# Altium PCB ATPComputerBoard.PcbDoc
Units mil, origin at the board's own origin, x right, y up, seen from the top; angles counter-clockwise.
Board outline 1394 x 1000 mil, 2 copper layers (Top Layer, Bottom Layer); 23 components, 22 nets, 127 pads, 31 vias.
Unrouted connection lines stored in the file: 1.
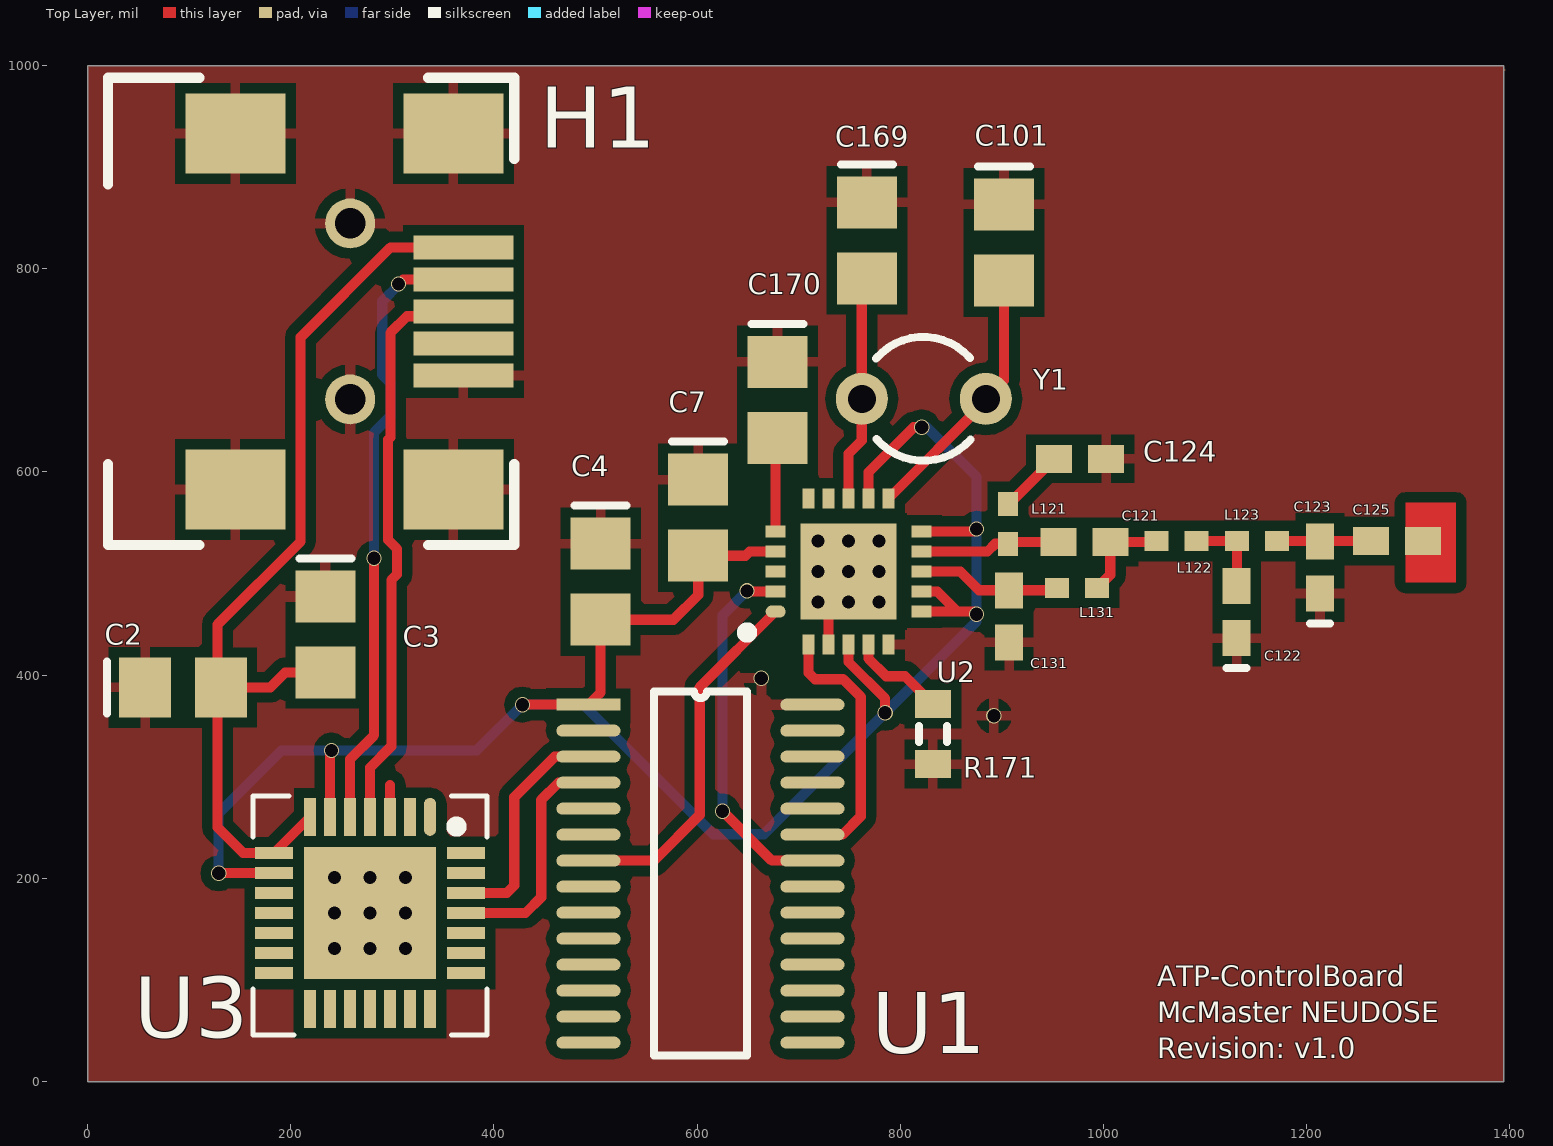
[diagram p0: Top Layer view]
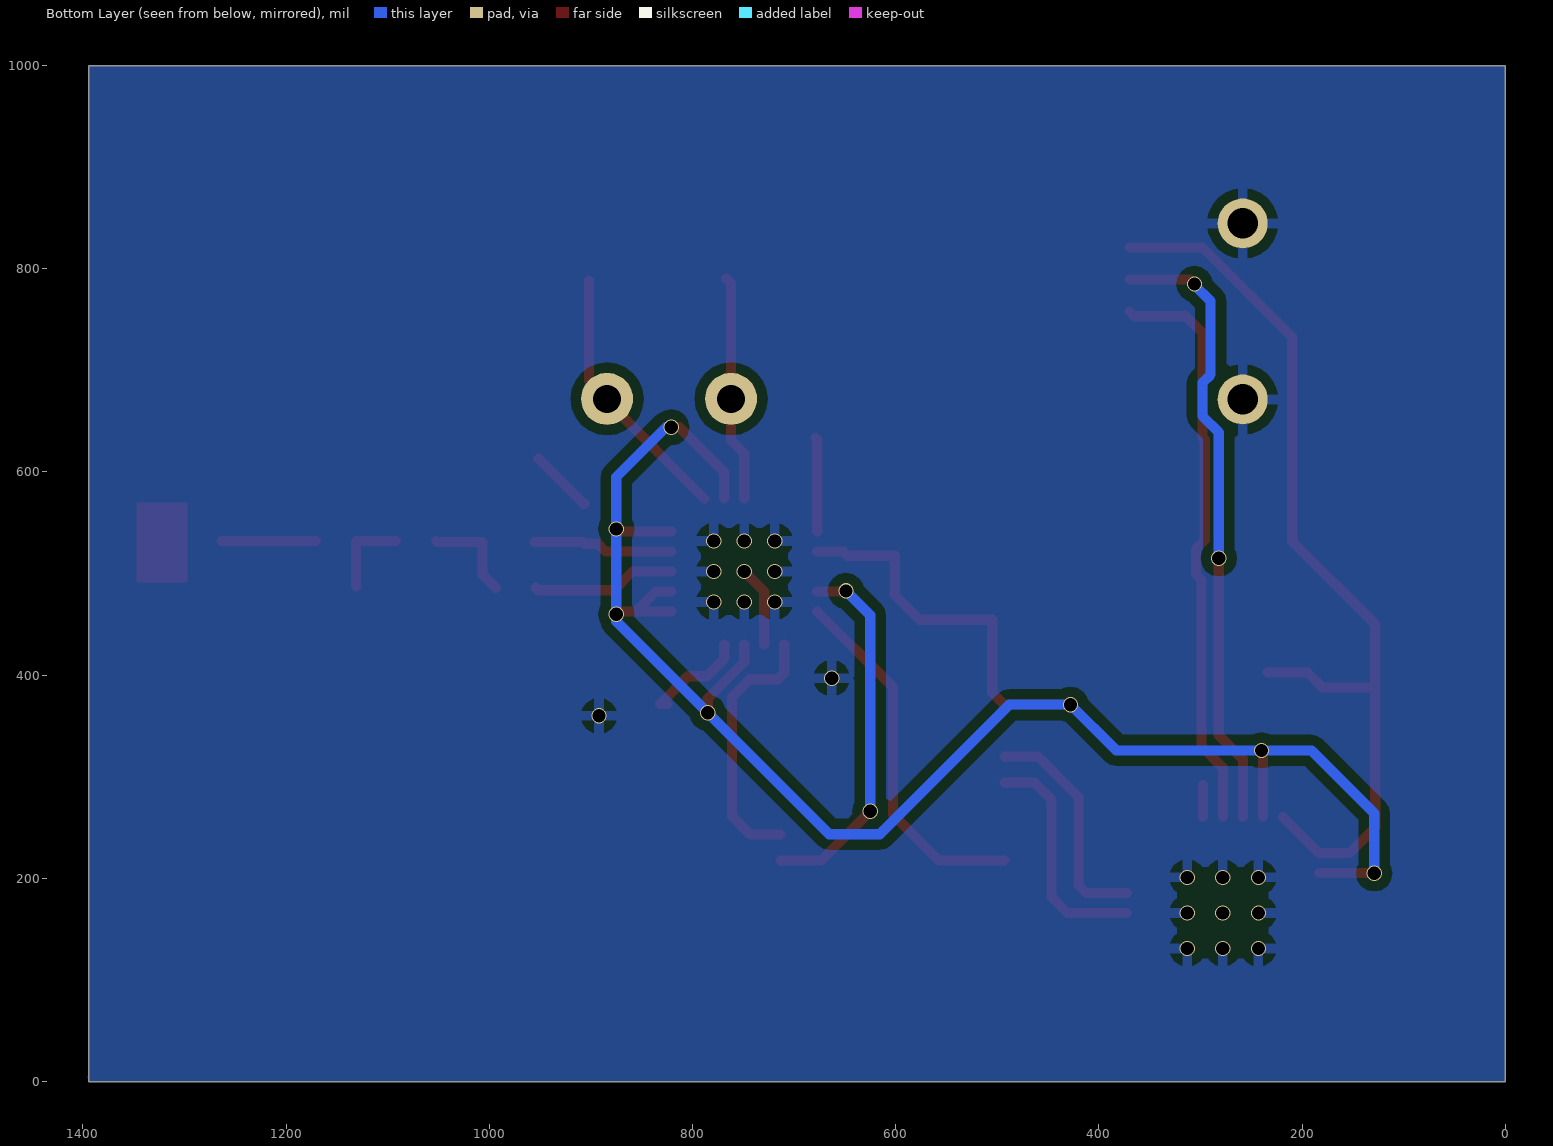
[diagram p1: Bottom Layer view, seen from below]

## Layer stack, top to bottom
Top Solder: solder mask 0.4, Solder Resist, Dk 3.5
Top Layer: signal copper 1.4
Dielectric 1: dielectric 12.6, FR-4, Dk 4.8
Bottom Layer: signal copper 1.4
Bottom Solder: solder mask 0.4, Solder Resist, Dk 3.5

## Board outline
0,0 0,1000 1394,1000 1394,0

## Design rules (kind name [scope] priority, off if disabled: settings)
Clearance [All] p1: gap=10
PolygonConnect [All] p1: connectstyle=Relief reliefconductorwidth=10 reliefentries=4 polygonreliefangle="90 Angle" airgapwidth=10
RoutingVias [All] p1: holewidth=28 width=50 viastyle="Through Hole" minholewidth=28 minwidth=50 maxholewidth=28 maxwidth=50
SolderMaskExpansion [All] p1: expansion=4
UnpouredPolygon [All] p1: allowunpoured=FALSE
Width [All] p1: maxlimit=10 minlimit=10 preferedwidth=10
29 further rules are at their usual default settings.

## Classes and differential pairs
component class CC110L: C101 C121 C122 C123 C124 C125 C131 C169 C170 L121 L122 L123 L131 R171 U2 Y1
component class CP2102: C2 C3 C4 C7 U3
component class MSP430: U1

## Components (designator, comment, footprint, x,y, rotation, side; value= is the part's Value field where it differs from the comment)
C2 "C0805" 0805 94,388 r0 top
C3 "C0805" 0805 234,440 r270 top
C4 "C0805" 0805 505,492 r270 top
C7 "C0805" 0805 601,555 r270 top
C101 "C0805" 0805 902,826 r270 top
C121 "C0402" 0402 981,531 r0 top
C122 "C0402" 0402 1131,462 r90 top
C123 "C0402" 0402 1213,506 r90 top
C124 "C0402" 0402 977,613 r0 top
C125 "C0402" 0402 1289,532 r0 top
C131 "C0402" 0402 907,458 r90 top
C169 "C0805" 0805 767,828 r270 top
C170 "C0805" 0805 679,671 r270 top
H1 "MiniUSB" MiniUSB 360,758 r270 top
L121 "Inductor" 0402-A 906,549 r90 top
L122 "Inductor" 0402-A 1072,532 r180 top
L123 "Inductor" 0402-A 1151,532 r180 top
L131 "Inductor" 0402-A 974,486 r0 top
R171 "Res3" J1-0603 832,342 r270 top
U1 "MSP430" 28TSSOP 493,371 r0 top locked
U2 "CC110L 20QFN" 20QFN 749,502 r90 top
U3 "CP2102" CP2102 278,166 r270 top
Y1 "XTAL" R38 823,672 r270 top

## Footprints (in the part's own frame and the unit in brackets; to place one, negate y for a bottom-side part, rotate by r counter-clockwise, add the part's x,y. Pads: shape width x height; smd on the part's side, far side on the other; paste and mask are expansions set on the pad)
20QFN [mm]
  rect 2.4x2.4 smd mask+0: 0(0,0)
  oval 0.3x0.5 smd: 1(-1,1.825)
  rect 0.3x0.5 smd: 2(-0.5,1.825) 3(0,1.825) 4(0.5,1.825) 5(1,1.825) 11(1,-1.825) 12(0.5,-1.825) 13(0,-1.825) 14(-0.5,-1.825) 15(-1,-1.825)
  rect 0.5x0.3 smd: 6(1.825,1) 7(1.825,0.5) 8(1.825,0) 9(1.825,-0.5) 10(1.825,-1) 16(-1.825,-1) 17(-1.825,-0.5) 18(-1.825,0) 19(-1.825,0.5) 20(-1.825,1)
  silkscreen extent -1.65,2.41 -1.4,2.67, body extent -2.07,-2.07 2.07,2.07, height 1
28TSSOP [mm]
  rect 1.6x0.3 smd: 1(0,0)
  oval 1.6x0.3 smd: 2(0,-0.65) 3(0,-1.3) 4(0,-1.95) 5(0,-2.6) 6(0,-3.25) 7(0,-3.9) 8(0,-4.55) 9(0,-5.2) 10(0,-5.85) 11(0,-6.5) 12(0,-7.15) 13(0,-7.8) 14(0,-8.45) 15(5.6,-8.45) 16(5.6,-7.8) 17(5.6,-7.15) 18(5.6,-6.5) 19(5.6,-5.85) 20(5.6,-5.2) 21(5.6,-4.55) 22(5.6,-3.9) 23(5.6,-3.25) 24(5.6,-2.6) 25(5.6,-1.95) 26(5.6,-1.3) 27(5.6,-0.65) 28(5.6,0)
  silkscreen extent 1.63,-8.78 3.97,0.33, body extent -0.42,-9.07 6,0.63, height 0.88
0402 [mm] "Chip Capacitor; Body 1.0 x 0.5 mm (LxW typ)"
  rect 0.9x0.7 smd: 1(-0.65,0) 2(0.65,0)
0402-A [mm] "Chip Inductor, Body 1.0x0.5mm, IPC High Density"
  rect 0.6x0.5 smd: 1(-0.5,0) 2(0.5,0)
  body extent -0.55,-0.3 0.55,0.3, height 0.55
0805 [mm] "Chip Capacitor; Body 2.0 x 1.2 mm (LxW typ)"
  rect 1.3x1.5 smd: 1(-0.95,0) 2(0.95,0)
  silkscreen extent -1.9,-0.65 -1.9,0.65
CP2102 [mm]
  rect 3.3x3.3 smd mask+0: 0(0,0)
  oval 0.95x0.3 smd mask+0: 1(-2.4,1.5)
  rect 0.95x0.3 smd mask+0: 2(-2.4,1) 3(-2.4,0.5) 4(-2.4,0) 5(-2.4,-0.5) 6(-2.4,-1) 7(-2.4,-1.5) 15(2.4,-1.5) 16(2.4,-1) 17(2.4,-0.5) 18(2.4,0) 19(2.4,0.5) 20(2.4,1) 21(2.4,1.5)
  rect 0.3x0.95 smd mask+0: 8(-1.5,-2.4) 9(-1,-2.4) 10(-0.5,-2.4) 11(0,-2.4) 12(0.5,-2.4) 13(1,-2.4) 14(1.5,-2.4) 22(1.5,2.4) 23(1,2.4) 24(0.5,2.4) 25(0,2.4) 26(-0.5,2.4) 27(-1,2.4) 28(-1.5,2.4)
  silkscreen extent -2.92,-2.92 3.05,2.92, body extent -2.5,-2.5 2.5,2.5, height 1
J1-0603 [mm] "Chip Resistor, Body 1.6x0.8mm, IPC High Density"
  rect 0.7x0.9 smd: 1(-0.75,0) 2(0.75,0)
  silkscreen extent -0.2,-0.35 0.2,0.35, body extent -0.85,-0.48 0.85,0.48, height 0.9
MiniUSB [mm]
  rect 0.6x2.5 smd: 1(-1.6,0.25) 2(-0.8,0.25) 3(0,0.25) 4(0.8,0.25) 5(1.6,0.25)
  rect 2x2.5 smd: 6(-4.45,0) 7(-4.45,-5.45) 8(4.45,0) 9(4.45,-5.45)
  round 1.25 hole 0.762: 9(-2.2,-2.58) 10(2.2,-2.58)
  silkscreen extent -5.84,-8.64 5.84,1.52, body extent -4.95,-8.41 4.95,1.09, height 3.9
R38 [mm] "Crystal, Thru-Hole; 2 Leads; Body 3.1 x 8.2 mm (Dia.xH)"
  round 1.3 hole 0.7: 1(0,1.55) 2(0,-1.55)
  silkscreen extent -1.55,-1.19 1.55,1.17

## Part data
C2 C3 C4 C7 C101 C121 C122 C123 C124 C125 C131 C169 C170: "Ceramic Chip Capacitor - Standard"
R171: "Resistor"
Y1: "Crystal Oscillator"

## Via types
v1: diameter 15, hole 13, Top Layer to Bottom Layer, 31 vias

## Nets (pads, with @x,y where several pads share a name; then routed paths per layer and width w, separated by ;. In a path a pad name is that pad's centre, name@x,y a point inside that pad or via, vN(x,y) a via of type N, cw(c..) or ccw(c..) an arc to the next point about the centre after c; other vN are vias at no path point)
"3.3 VCC": C4.2 C7.2 U1.1 U2.4 U2.9 U2.11 U2.14 U2.15 U2.18 U3.6 U3.9 | length 2034.4
  Top Layer w10: v1(129,205) 129.37,205.37 U3.9 ; U3.6 238.63,324.63 v1(240,326) ; v1(428,371) U1.1 505,383 C4.2 576.6,454.6 601,479 C7.2 647.6,517.6 651.69,521.69 U2.4 ; U2.18 749,413 785,377 v1(785,363) ; U2.9 768.68,599.69 813,644 v1(821,644) ; U2.15 856,462.63 ; U2.14 836.32,482.32 856,462.63 ; U2.11 872.37,541.37 v1(875,544) ; v1(875,460) 872.37,462.63 856,462.63
  Bottom Layer w10: v1(129,205) 129,264 191,326 v1(240,326) 383,326 v1(428,371) 488.18,371 615.68,243.5 665.5,243.5 v1(785,363) 875,453 v1(875,460) v1(875,544) 875,595 826,644 v1(821,644)
CS1: U2.7
D+: H1.3 U3.4 | length 572.5
  Top Layer w10: U3.4 278,309 299,330 299,493.71 304.5,499.21 304.5,524.32 295.79,533.03 295.79,631.7 298.03,633.95 298.03,736.93 314.42,753.31 365.16,753.31 H1.3
D-: H1.2 U3.5 | length 618
  Top Layer w10: U3.5 258.32,317.32 282,341 v1(282,515) ; v1(306,785) 310.5,789.5 H1.2
  Bottom Layer w10: v1(282,515) 282,638.95 298.03,654.98 298.03,687.79 290,695.82 290,768 307,785 v1(306,785)
GND: C2.1 C3.1 C4.1 C7.1 C101.1 C122.1 C123.1 C124.2 C131.1 C169.1 C170.1 H1.5 H1.6 H1.7 H1.8 H1.9 H1.10 R171.2 U1.28 U2.0 U2.16 U2.19 U3.0 U3.3 | length 111.2
  Top Layer w10: U3.3 297.69,291.69 ; U2.19 729.32,482.31 v1(749,502)
  other v1: 243,131 278,131 313,131 243,166 278,166 313,166 243,201 278,201 313,201 892,360 663,397 719,472 749,472 779,472 719,502 779,502 719,532 749,532 779,532
MISO: U1.22 U2.2 | length 364
  Top Layer w10: v1(625,266) 673.54,217.46 U1.22 ; v1(649,483) 649.68,482.32 U2.2
  Bottom Layer w10: v1(625,266) 625,459 v1(649,483)
MOSI: U1.23 U2.20 | length 261.6
  Top Layer w10: U2.20 709.63,402.37 716,396 743.63,396 761,378.63 761,261.01 743.04,243.05 U1.23
NetC101_2: C101.2 U2.10 Y1.1 | length 261.8
  Top Layer w10: U2.10 884.02,669.5 Y1.1 902,689.98 C101.2
NetC121_1: C121.1 L121.1 U2.12 | length 138.4
  Top Layer w10: U2.12 885.69,521.69 893.32,529.31 L121.1 907.68,531 C121.1
NetC121_2: C121.2 L122.2 L131.2 | length 96.5
  Top Layer w10: L131.2 1006.59,498.91 C121.2 1051.31,531 L122.2
NetC122_2: C122.2 L122.1 L123.2 | length 84.2
  Top Layer w10: L122.1 L123.2 1131.31,487.91 C122.2
NetC123_2: C123.2 C125.1 L123.1 | length 92.7
  Top Layer w10: L123.1 1212.59,532 C125.1
NetC124_1: C124.1 L121.2 | length 63.8
  Top Layer w10: L121.2 907.09,568.69 C124.1
NetC131_2: C131.2 L131.1 U2.13 | length 142.1
  Top Layer w10: U2.13 859,502 877.41,483.59 C131.2 951.91,483.59 L131.1
NetC169_2: C169.2 U2.8 Y1.2 | length 224.2
  Top Layer w10: U2.8 749,618 761.98,630.98 Y1.2 761.98,785.57 C169.2
NetC170_2: C170.2 U2.5 | length 93
  Top Layer w10: U2.5 677.15,631.75 C170.2
NetR171_1: R171.1 U2.17 | length 102.9
  Top Layer w10: U2.17 768.68,416.31 786,399 804.53,399 R171.1 R171.1@824.76,371.53
RF_OUT: C125.2
SCLK: U1.7 U2.1 | length 359.2
  Top Layer w10: U1.7 557.46,217.46 602.5,262.5 602.5,387.98 U2.1
UART_RX_IN: U1.4 U3.25 | length 229.7
  Top Layer w10: U3.25 431,166 446.5,181.5 446.5,277.3 463.44,294.23 U1.4
UART_TX_OUT: U1.3 U3.26 | length 227
  Top Layer w10: U3.26 412.68,185.68 420,193 420,280 459.82,319.82 U1.3
VBUS: C2.2 C3.2 H1.1 U3.7 U3.8 | length 941.2
  Top Layer w10: U3.7 U3.8 153.05,225.06 128,250.11 C2.2@128,388 ; C3.2 194.6,402.6 180,388 C2.2 C2.2@128,388 ; H1.1 297.99,820.99 209.65,732.65 209.65,531.65 128,450 C2.2@128,388
pads on no net: H1.4 U1.2 U1.5 U1.6 U1.8 U1.9 U1.10 U1.11 U1.12 U1.13 U1.14 U1.15 U1.16 U1.17 U1.18 U1.19 U1.20 U1.21 U1.24 U1.25 U1.26 U1.27 U2.3 U2.6 U3.1 U3.2 U3.10 U3.11 U3.12 U3.13 U3.14 U3.15 U3.16 U3.17 U3.18 U3.19 U3.20 U3.21 U3.22 U3.23 U3.24 U3.27 U3.28

## Polygon pours and split planes (outlines as drawn)
GND on Top Layer "TopLayerGNDPlane " (solid, pour order 2): 0,0 0,1000 1400,1000 1394,994 1394,0
GND on Bottom Layer "BottomLayerGNDPlane " (solid, pour order 4): 0,0 0,1000 1394,1000 1394,6 1400,0

## Other copper
Top Layer:
  rectangle net RF_OUT: 1297,491 1347,570

## Silkscreen, mask and mechanical layers (free items; w line width, h text height)
Top Overlay:
  text "ATP-ControlBoard" at 1053,94 h20
  text "McMaster NEUDOSE" at 1053,58.5 h20
  text "Revision: v1.0" at 1053,23 h20
Mechanical 1:
  the board outline again, w10